# Altium PCB ACS712.PcbDoc
Units mm, origin at the board's own origin, x right, y up, seen from the top; angles counter-clockwise.
Board outline 32.91 x 23.94 mm, 2 copper layers (Top Layer, Bottom Layer); 11 components, 7 nets, 25 pads, 49 vias.
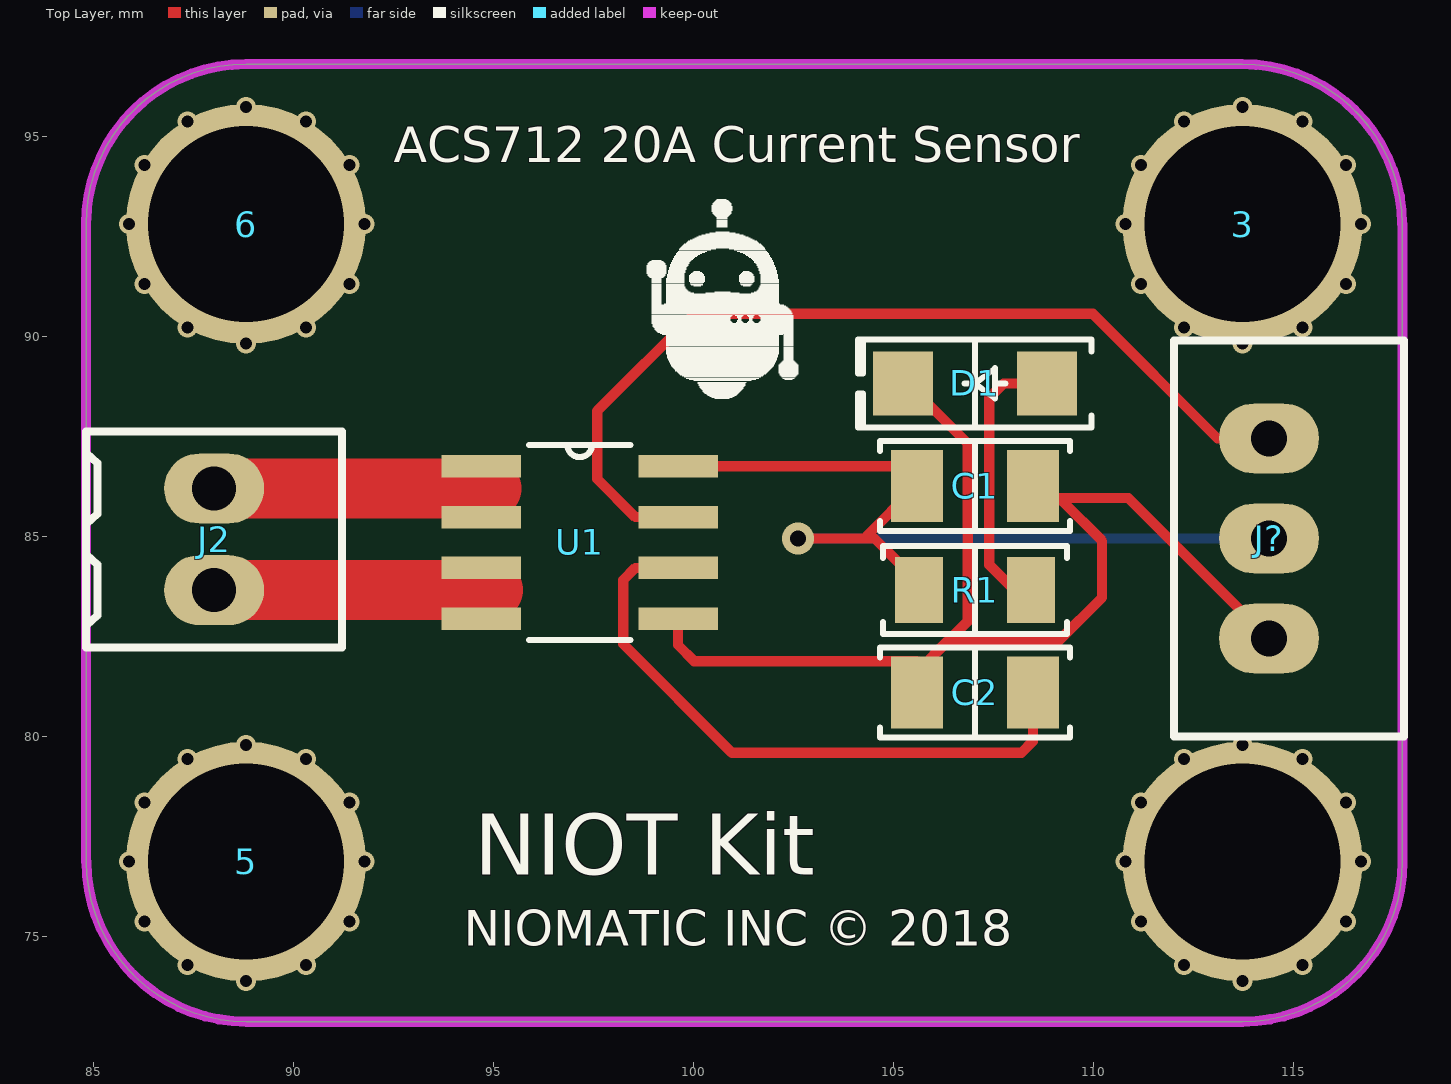
[diagram p0: Top Layer view]
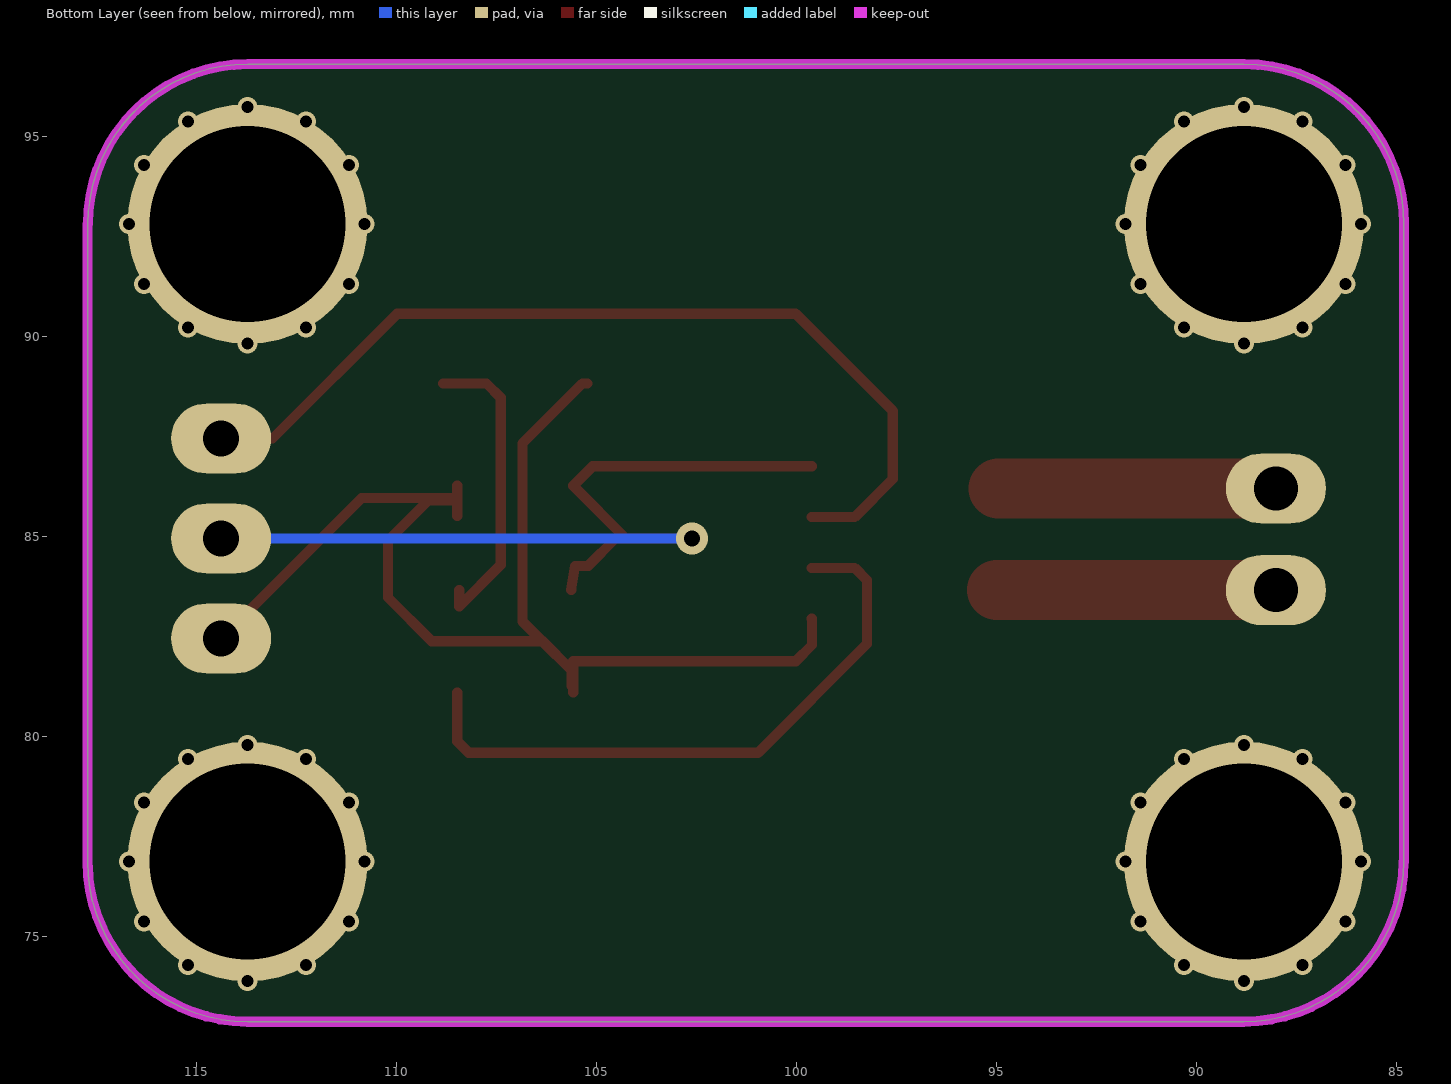
[diagram p1: Bottom Layer view, seen from below]
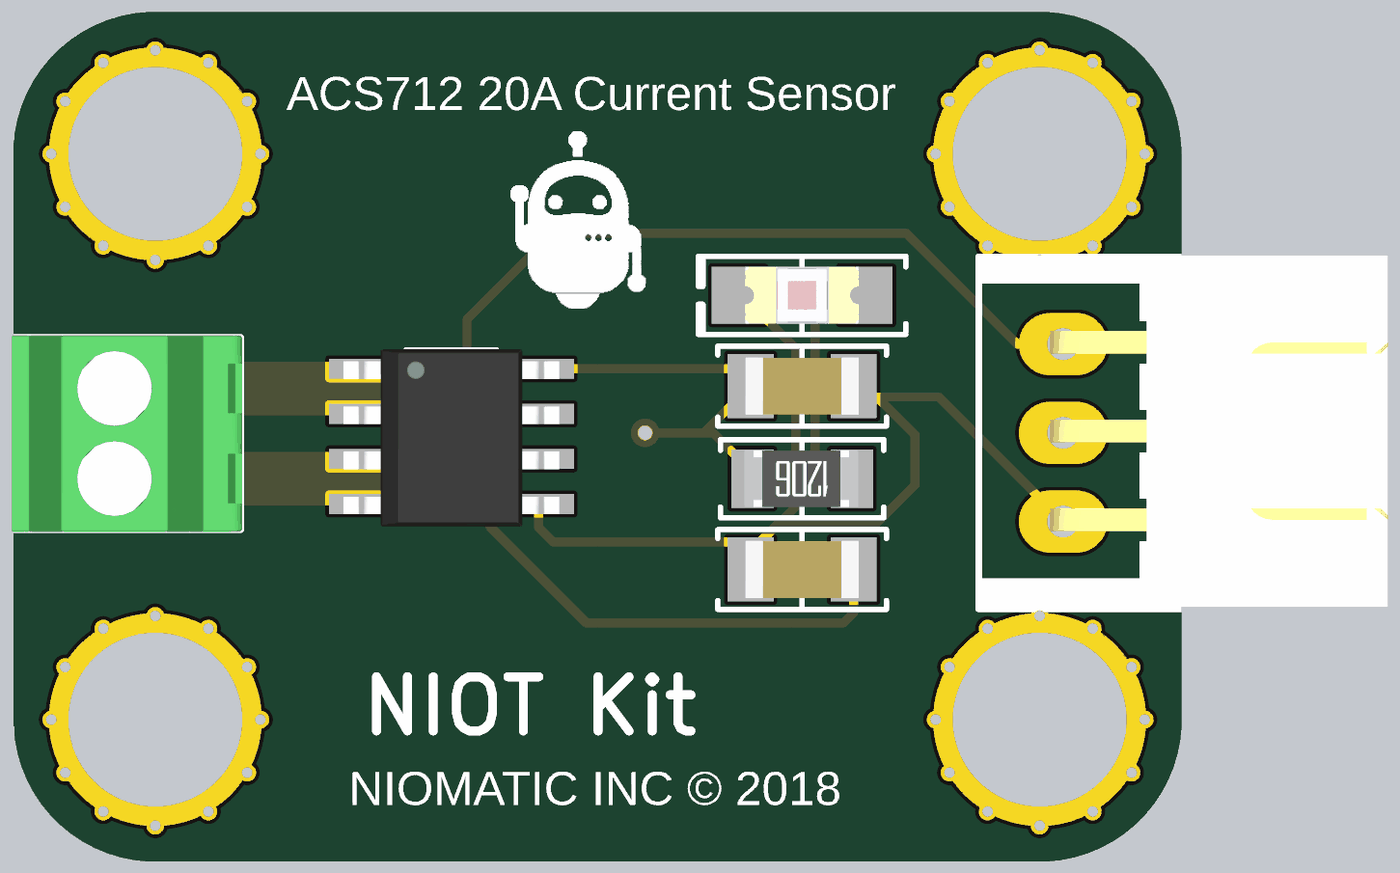
[diagram p2: 3D render of the assembled board from above, using the file's embedded part models]

## Layer stack, top to bottom
Top Solder: solder mask 0.0102, Solder Resist, Dk 3.5
Top Layer: signal copper 0.0356
Dielectric 1: dielectric 0.32, FR-4, Dk 4.8
Bottom Layer: signal copper 0.0356
Bottom Solder: solder mask 0.0102, Solder Resist, Dk 3.5

## Board outline
84.82,76.88 84.82,92.82 cw(c88.82,92.82) 88.82,96.82 113.72,96.82 cw(c113.72,92.82) 117.72,92.82 117.729,92.82 117.729,76.88 cw(c113.729,76.88) 113.729,72.88 88.829,72.88 cw(c88.829,76.88)

## Design rules (kind name [scope] priority, off if disabled: settings)
Clearance [All] p1: gap=0.254 ignorepadtopadclearanceinfootprint=FALSE except(0: Arc-Hole Track-Hole SMDPad-Hole THPad-Hole Via-Hole Fill-Hole Poly-Hole Region-Hole Text-Hole)
PolygonConnect [All] p1: connectstyle=Relief reliefconductorwidth=0.254 reliefentries=4 polygonreliefangle="90 Angle" airgapwidth=0.254
RoomDefinition ACS712 [InComponentClass('ACS712')] p1: confinementstyle=ConfineIn formatcopy=TRUE lockcomponents=FALSE outline 178.943,26.924 198.247,26.924 198.247,44.577 178.943,44.577
RoutingVias [All] p1: holewidth=0.711 width=1.27 viastyle="Through Hole" minholewidth=0.711 minwidth=1.27 maxholewidth=0.711 maxwidth=1.27
SolderMaskExpansion [All] p1: expansion=0.102
Width [All] p1: maxlimit=0.254 minlimit=0.254 preferedwidth=0.254
30 further rules are at their usual default settings.

## Classes and differential pairs
component class ACS712: C1 C2 D1 J2 J? R1

## Components (designator, comment, footprint, x,y, rotation, side; value= is the part's Value field where it differs from the comment)
3 "Lego" "Lego Hole" 113.73,92.82 r90 top
5 "Lego" "Lego Hole" 88.819,76.88 r90 top
6 "Lego" "Lego Hole" 88.819,92.82 r90 top
C1 "100nF" "CAP 1206/3216" 107.039,86.277 r0 top value=0.1uF
C2 "1nF" "CAP 1206/3216" 107.039,81.11 r0 top value=0.1uF
D1 "Green" "LED 1206/3216 RED" 107.039,88.835 r180 top
J2 "2 Pin" "TE 282834-2" 88.02,84.94 r90 top
J? "Header" "JST XH B3B-XH-A - RIGHT" 114.392,84.96 r90 top
R1 "1K" "RES 1206/3216" 107.039,83.668 r180 top
U1 "ACS712ELCTR-20A-T" SOIC127P600X175-8N 97.16,84.86 r0 top
? "Lego" "Lego Hole" 113.73,76.88 r90 top

## Footprints (in the part's own frame and the unit in brackets; to place one, negate y for a bottom-side part, rotate by r counter-clockwise, add the part's x,y. Pads: shape width x height; smd on the part's side, far side on the other; paste and mask are expansions set on the pad)
"CAP 1206/3216" [mm] "Chip Capacitor, 2-Leads, Body 3.25x1.60mm, IPC Medium Density"
  rect 1.3x1.8 smd: 1(-1.45,0) 2(1.45,0)
  silkscreen extent -2.38,-1.13 2.37,1.13, body extent -1.6,-0.81 1.6,0.81, height 1.62
"JST XH B3B-XH-A - RIGHT" [mm]
  oval 1.75x2.5 hole 0.9: 1(-2.5,0) 2(0,0) 3(2.5,0)
  silkscreen extent -4.95,-3.38 4.95,2.38, body extent -4.9,-9.15 5,2.35, height 6.1
"LED 1206/3216 RED" [mm] "Chip Diode, 2-Leads, Body 3.13x1.55mm, IPC Medium Density"
  rect 1.5x1.6 smd: 1(-1.8,0) 2(1.8,0)
  silkscreen extent -2.92,-1.1 2.92,1.1, body extent -1.6,-0.8 1.6,0.8, height 0.9
"Lego Hole" [mm]
  round 6 hole 4.9: 0(0,0)
"RES 1206/3216" [mm] "Chip Resistor, 2-Leads, Body 3.13x1.55mm, IPC Medium Density"
  rect 1.2x1.65 smd: 1(-1.4,0) 2(1.4,0)
  silkscreen extent -2.3,-1.1 2.3,1.1, body extent -1.57,-0.8 1.62,0.8, height 0.6
SOIC127P600X175-8N [mil]
  rect 78x22 smd: 1(-97,75) 2(-97,25) 3(-97,-25) 4(-97,-75) 5(97,-75) 6(97,-25) 7(97,25) 8(97,75)
  silkscreen extent -50,-96 50,96, body extent -120,-100 120,97, height 69
"TE 282834-2" [mm]
  oval 1.75x2.5 hole 1.1: 1(-1.27,0) 2(1.27,0)
  silkscreen extent -2.7,-3.2 2.7,3.2, body extent -2.77,-3.25 2.77,3.25, height 10

## Part data
C1 C2: library part Capacitor, "SMT Capacitor"
D1: library part LED, "Chip LED"
J?: library part "3 Pin"
R1: library part Resistor, "SMT Resistor"
U1: "SENSOR CURRENT HALL 20A AC/DC", Package="SOIC-8 Allegro MicroSystems LLC", Availability=Good, MF=Allegro, MP=ACS712ELCTR-20A-T, Price="2.93 USD"

## Via types
v1: diameter 0.5, hole 0.3, Top Layer to Bottom Layer, 48 vias
v2: diameter 0.8, hole 0.4, Top Layer to Bottom Layer, tented both sides, 1 vias

## Nets (pads, with @x,y where several pads share a name; then routed paths per layer and width w, separated by ;. In a path a pad name is that pad's centre, name@x,y a point inside that pad or via, vN(x,y) a via of type N, cw(c..) or ccw(c..) an arc to the next point about the centre after c; other vN are vias at no path point)
GND: C1.2 C2.1 D1.2 J?.1 U1.5 | length 33.4
  Top Layer w0.254: U1.5 99.619,82.955 99.619,82.296 100.025,81.89 105.589,81.89 C2.1@105.589,81.619 ; D1.2 105.359,88.835 106.86,87.334 106.86,82.89 106.361,82.391 ; C2.1 C2.1@105.589,81.619 ; C2.1@105.63,81.27 C2.1@105.63,81.66 ; C1.2@108.489,85.522 108.489,85.91 109.21,85.91 110.22,84.9 110.22,83.485 109.125,82.391 106.361,82.391 ; C1.2 108.489,85.97 110.88,85.97 114.39,82.46 J?.1 ; C2.1@105.589,81.619 C2.1@105.63,81.66 ; C2.1@105.63,81.66 106.361,82.391 ; C2.1@105.63,81.66 105.63,81.67 106.351,82.391 106.361,82.391
IP+: J2.2 U1.1 U1.2 | length 7.7
  Top Layer w0: 94.141,86.21 U1.1
  Top Layer w1.5: J2.2 94.141,86.21 94.95,86.21
IP-: J2.1 U1.3 U1.4 | length 7
  Top Layer w1.5: J2.1 94.99,83.67
NetC2_2: C2.2 U1.6 | length 15.8
  Top Layer w0.254: U1.6 98.552,84.225 98.247,83.92 98.247,82.321 100.965,79.604 108.204,79.604 108.489,79.889 C2.2
NetD1_1: D1.1 R1.1 | length 7.6
  Top Layer w0.254: R1.1 108.439,83.261 107.4,84.3 107.4,88.477 107.758,88.835 D1.1
NetJ?_3: J?.3 U1.7 | length 23.2
  Top Layer w0.254: U1.7 98.552,85.495 97.6,86.447 97.6,88.151 100.029,90.58 109.986,90.58 113.106,87.46 J?.3
VCC: C1.1 J?.2 R1.2 U1.8 | length 23.6
  Top Layer w0.254: U1.8 105.101,86.765 C1.1 104.272,84.96 ; v2(102.616,84.96) 104.272,84.96 ; R1.2 105.546,84.276 105.214,84.276 104.53,84.96 104.272,84.96
  Bottom Layer w0.254: v2(102.616,84.96) J?.2
pads on no net: 3.0 5.0 6.0 ?.0
copper on no net: | length 0.4
  Top Layer w0.254: 113.98,84.96 114.392,84.96
  other v1: 88.819,73.891 113.73,73.891 87.353,74.291 90.314,74.291 112.264,74.291 115.225,74.291 86.281,75.386 91.408,75.386 111.192,75.386 116.319,75.386 85.889,76.88 91.779,76.88 110.8,76.88 116.69,76.88 86.281,78.361 91.408,78.361 111.192,78.361 116.319,78.361 87.353,79.444 90.314,79.444 112.264,79.444 115.225,79.444 88.819,79.801 113.73,79.801 88.819,89.831 113.73,89.831 87.353,90.231 90.314,90.231 112.264,90.231 115.225,90.231 86.281,91.325 91.408,91.325 111.192,91.325 116.319,91.325 85.889,92.82 91.779,92.82 110.8,92.82 116.69,92.82 86.281,94.301 91.408,94.301 111.192,94.301 116.319,94.301 87.353,95.384 90.314,95.384 112.264,95.384 115.225,95.384 88.819,95.741 113.73,95.741

## Keep-outs
Keep-Out Layer:
  lines w0.254: 84.82,76.88 84.82,92.82 cw(c88.82,92.82) 88.82,96.82 113.72,96.82 cw(c113.72,92.82) 117.72,92.82 ; 84.829,76.88 ccw(c88.829,76.88) 88.829,72.88 113.729,72.88 ccw(c113.729,76.88) 117.729,76.88 117.729,92.82

## Silkscreen, mask and mechanical layers (free items; w line width, h text height)
Top Overlay:
  drawing of 381 lines, arcs and shapes, not listed
  text "ACS712 20A Current Sensor" at 92.515,94.06 h1.52
  text "NIOT Kit" at 94.521,76.55 h1.52
  text "NIOMATIC INC © 2018" at 94.267,74.48 h1.52